# EAGLE board omnetics_nano_breakout_reverse_v2 (EAGLE 8.2.2)
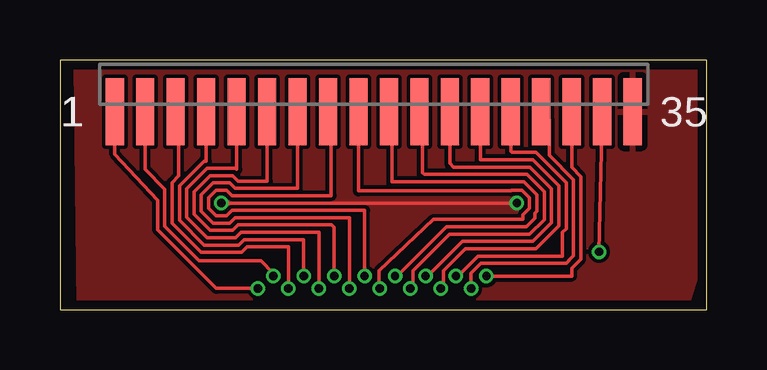
[diagram p0: board, top side]
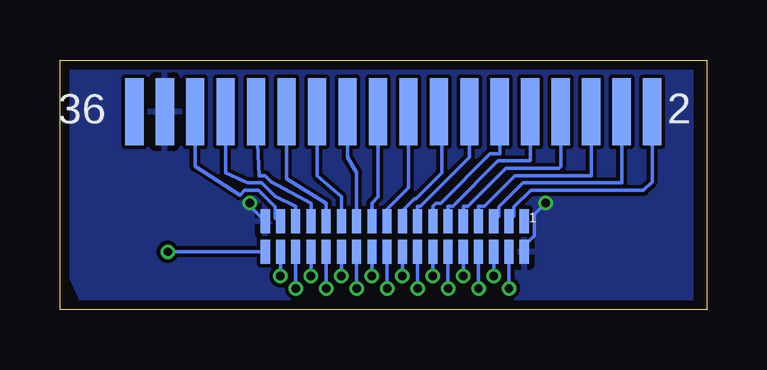
[diagram p1: board, bottom side, seen from below]

Size 26.97 x 10.4 mm. Coordinates in mm from the lower left corner, seen from the top.
Outline: 0,0 26.97,0 26.97,10.4 0,10.4 0,0
Copper layers (1*16): Top 0.035559375mm / dielectric 1.6mm / Bottom 0.035559375mm
Design rules "oshpark-2layer": minimum track width 6mil, minimum drill 10mil, track to track 6mil, track to pad 6mil, pad to pad 6mil, via to via 6mil, smd to smd 6mil, copper to edge 15mil, drill to drill 6mil, minimum pad ring 5mil, minimum via ring 5mil, stop-mask expansion 2.5mil, vias tented up to drill 0mil, thermal gap 10mil

## Footprints (pad centres in the part's own frame; a part is rotated, then mirrored left to right if it is on the bottom)
SFMC-118-L1-S-D = smd 0.762 x 2.794: 1 -10.795,-2.032; 3 -9.525,-2.032; 5 -8.255,-2.032; 7 -6.985,-2.032; 9 -5.715,-2.032; 11 -4.445,-2.032; 13 -3.175,-2.032; 15 -1.905,-2.032; 17 -0.635,-2.032; 19 0.635,-2.032; 21 1.905,-2.032; 23 3.175,-2.032; 25 4.445,-2.032; 27 5.715,-2.032; 29 6.985,-2.032; 31 8.255,-2.032; 33 9.525,-2.032; 35 10.795,-2.032 | smd 0.762 x 2.794 bottom: 2 -10.795,-2.032; 4 -9.525,-2.032; 6 -8.255,-2.032; 8 -6.985,-2.032; 10 -5.715,-2.032; 12 -4.445,-2.032; 14 -3.175,-2.032; 16 -1.905,-2.032; 18 -0.635,-2.032; 20 0.635,-2.032; 22 1.905,-2.032; 24 3.175,-2.032; 26 4.445,-2.032; 28 5.715,-2.032; 30 6.985,-2.032; 32 8.255,-2.032; 34 9.525,-2.032; 36 10.795,-2.032
OMNETICS_NANO_18X2 = smd 0.381 x 1.016: GND0 0,1.27; GND34 10.795,0; P_1 0.635,1.27; P_2 0.635,0; P_3 1.27,1.27; P_4 1.27,0; P_5 1.905,1.27; P_6 1.905,0; P_7 2.54,1.27; P_8 2.54,0; P_9 3.175,1.27; P_10 3.175,0; P_11 3.81,1.27; P_12 3.81,0; P_13 4.445,1.27; P_14 4.445,0; P_15 5.08,1.27; P_16 5.08,0; P_17 5.715,1.27; P_18 5.715,0; P_19 6.35,1.27; P_20 6.35,0; P_21 6.985,1.27; P_22 6.985,0; P_23 7.62,1.27; P_24 7.62,0; P_25 8.255,1.27; P_26 8.255,0; P_27 8.89,1.27; P_28 8.89,0; P_29 9.525,1.27; P_30 9.525,0; P_31 10.16,1.27; P_32 10.16,0; REF0 0,0; REF33 10.795,1.27

## Placement (x,y rotation side)
U$1  SFMC-118-L1-S-D  [SFMC-118-L1-S-D]  13.08,10.29 0 top
U$2  OMNETICS_NANO_18X2  [OMNETICS_NANO_18X2]  7.62,3.68 180 bottom

## Library data of the parts
U$1 = tuckerLib
U$2 = Sombeck_lib

## Nets
AGND: U$1.33 U$2.REF33
GND: U$1.34 U$1.35 U$2.GND0 U$2.GND34
N$1: U$1.1 U$2.P_1
N$2: U$1.2 U$2.P_2
N$3: U$1.4 U$2.P_4
N$4: U$1.6 U$2.P_6
N$5: U$1.8 U$2.P_8
N$6: U$1.10 U$2.P_10
N$7: U$1.12 U$2.P_12
N$8: U$1.14 U$2.P_14
N$9: U$1.16 U$2.P_16
N$10: U$1.18 U$2.P_18
N$11: U$1.20 U$2.P_20
N$12: U$1.22 U$2.P_22
N$13: U$1.24 U$2.P_24
N$14: U$1.26 U$2.P_26
N$15: U$1.28 U$2.P_28
N$16: U$1.30 U$2.P_30
N$17: U$1.32 U$2.P_32
N$18: U$1.3 U$2.P_3
N$19: U$1.5 U$2.P_5
N$20: U$1.7 U$2.P_7
N$21: U$1.9 U$2.P_9
N$22: U$1.11 U$2.P_11
N$23: U$1.13 U$2.P_13
N$24: U$1.15 U$2.P_15
N$25: U$1.17 U$2.P_17
N$26: U$1.19 U$2.P_19
N$27: U$1.21 U$2.P_21
N$28: U$1.23 U$2.P_23
N$29: U$1.25 U$2.P_25
N$30: U$1.27 U$2.P_27
N$31: U$1.29 U$2.P_29
N$32: U$1.31 U$2.P_31

## Tracks (layer width: path | path; a pad name or v marks a point on that pad's centre or on a via)
AGND  (via drill 0.35)
  Top 0.152: v22.48,2.41 U$1.33
  Bottom 0.152: U$2.REF33 v22.48,2.41
GND  (via drill 0.35)
  Top 0.152: v6.73,4.45 v19.05,4.45
  Bottom 0.152: v6.73,4.45 7.2,3.98 7.2,3.08 7.62,2.66 U$2.GND0 | v19.05,4.45 19.05,4.32 U$2.GND34
  pour Bottom: 0.64,10.16 26.54,10.16 26.54,1.4 26.04,0.25 0.64,0.38
  pour Top: 0.64,10.16 26.54,10.16 26.54,1.4 26.16,0.13 0.76,0.13
N$1  (via drill 0.35)
  Top 0.152: v8.25,0.89 6.52,0.89 4.07,3.34 4.07,4.57 2.29,6.48 U$1.1
  Bottom 0.152: U$2.P_1 v8.25,0.89
N$2
  Bottom 0.152: U$2.P_2 8.04,3.9 8.04,4.29 7.35,4.98 2.64,4.98 2.29,5.33 U$1.2
N$3
  Bottom 0.152: U$2.P_4 8.67,3.9 8.67,4.29 7.68,5.28 3.56,5.28 U$1.4
N$4
  Bottom 0.152: U$2.P_6 9.52,4.32 9.28,4.32 8.01,5.59 4.83,5.59 U$1.6
N$5
  Bottom 0.152: U$2.P_8 10.16,4.32 9.96,4.32 8.38,5.89 6.17,5.89 6.1,5.97 U$1.8
N$6
  Bottom 0.152: U$2.P_10 10.79,4.32 10.59,4.32 8.71,6.2 7.39,6.2 7.37,6.22 U$1.10
N$7
  Bottom 0.152: U$2.P_12 11.43,4.32 11.3,4.45 11.1,4.45 9.04,6.5 8.64,6.5 U$1.12
N$8
  Bottom 0.152: U$2.P_14 12.06,4.32 11.94,4.32 9.91,6.35 U$1.14
N$9
  Bottom 0.152: U$2.P_16 12.7,4.11 12.19,4.62 12.14,4.62 11.05,5.71 11.05,8.13 U$1.16
N$10
  Bottom 0.152: U$2.P_18 13.33,4.19 12.45,5.08 U$1.18
N$11
  Bottom 0.152: U$2.P_20 13.97,4.45 13.72,4.7 U$1.20
N$12
  Bottom 0.152: U$2.P_22 14.6,5.71 14.99,6.35 U$1.22
N$13
  Bottom 0.152: U$2.P_24 15.24,4.7 16.26,5.59 U$1.24
N$14
  Bottom 0.152: U$2.P_26 15.88,4.45 17.53,5.46 U$1.26
N$15
  Bottom 0.152: U$2.P_28 16.51,4.45 18.17,5.33 18.43,5.59 18.66,5.59 18.67,5.59 U$1.28
N$16
  Bottom 0.152: U$2.P_30 17.14,4.32 18.01,4.73 18.56,5.28 19.16,5.28 20.07,5.71 U$1.30
N$17
  Bottom 0.152: U$2.P_32 18,3.82 18,4.29 18.69,4.98 19.27,4.98 19.47,4.77 21.34,5.97 U$1.32
N$18  (via drill 0.35)
  Top 0.152: v8.89,1.4 8.89,1.52 8.38,2.03 5.81,2.03 4.37,3.47 4.37,5.03 3.56,5.84 U$1.3
  Bottom 0.152: U$2.P_3 v8.89,1.4
N$19  (via drill 0.35)
  Top 0.152: v9.52,0.89 9.52,2.62 7.81,2.62 7.58,2.39 5.88,2.39 4.68,3.59 4.68,5.3 4.95,5.57 4.95,8.13 U$1.5
  Bottom 0.152: U$2.P_5 v9.52,0.89
N$20  (via drill 0.35)
  Top 0.152: v10.16,1.4 10.16,2.92 7.68,2.92 7.46,2.7 6.01,2.7 4.98,3.72 4.98,5.17 6.01,6.2 6.1,6.2 U$1.7
  Bottom 0.152: U$2.P_7 v10.16,1.4
N$21  (via drill 0.35)
  Top 0.152: v10.79,0.89 10.79,3.23 7.56,3.23 7.33,3 6.13,3 5.29,3.85 5.29,5.04 6.13,5.89 7.33,5.89 7.37,5.85 U$1.9
  Bottom 0.152: U$2.P_9 v10.79,0.89
N$22  (via drill 0.35)
  Top 0.152: v11.43,1.4 11.43,3.43 11.33,3.53 7.43,3.53 7.2,3.31 6.26,3.31 5.59,3.97 5.59,4.92 6.26,5.59 7.2,5.59 7.43,5.36 8.64,5.36 U$1.11
  Bottom 0.152: U$2.P_11 v11.43,1.4
N$23  (via drill 0.35)
  Top 0.152: v12.06,0.89 12.06,3.83 7.3,3.83 7.08,3.61 6.39,3.61 5.9,4.1 5.9,4.79 6.39,5.28 7.08,5.28 7.3,5.05 9.91,5.05 U$1.13
  Bottom 0.152: U$2.P_13 v12.06,0.89
N$24  (via drill 0.35)
  Top 0.152: v12.7,1.4 12.7,4.14 7.18,4.14 6.95,3.91 6.51,3.91 6.2,4.22 6.2,4.67 6.51,4.98 6.95,4.98 7.18,4.75 11.3,4.75 11.3,8.13 U$1.15
  Bottom 0.152: U$2.P_15 v12.7,1.4
N$25  (via drill 0.35)
  Top 0.152: v13.33,0.89 13.31,0.99 13.31,1.62 15.58,3.76 19.3,3.76 19.3,3.95 19.58,4.22 19.58,4.67 19.27,4.98 18.83,4.98 18.81,4.95 12.45,4.95 U$1.17
  Bottom 0.152: U$2.P_17 v13.33,0.89
N$26  (via drill 0.35)
  Top 0.152: v13.97,1.4 14.06,1.4 16.12,3.45 19.18,3.45 19.28,3.45 19.46,3.45 19.81,3.81 19.81,4.03 19.88,4.1 19.88,4.79 19.34,5.33 13.84,5.33 13.84,8 U$1.19
  Bottom 0.152: U$2.P_19 v13.97,1.4
N$27  (via drill 0.35)
  Top 0.152: v14.6,0.89 14.71,0.99 14.71,1.62 16.24,3.15 19.58,3.15 20.19,3.76 20.19,4.92 19.47,5.64 15.19,5.64 15.11,5.71 15.11,8 U$1.21
  Bottom 0.152: U$2.P_21 v14.6,0.89
N$28  (via drill 0.35)
  Top 0.152: v15.24,1.4 15.33,1.4 16.78,2.85 19.71,2.85 20.5,3.63 20.5,5.04 19.59,5.94 16.41,5.94 16.26,6.1 U$1.23
  Bottom 0.152: U$2.P_23 v15.24,1.4
N$29  (via drill 0.35)
  Top 0.152: v15.88,0.89 15.98,0.99 15.98,1.62 16.9,2.54 19.3,2.54 19.84,2.54 20.8,3.5 20.8,5.17 19.72,6.25 17.53,6.25 U$1.25
  Bottom 0.152: U$2.P_25 v15.88,0.89
N$30  (via drill 0.35)
  Top 0.152: v16.51,1.4 16.6,1.4 17.43,2.23 20.95,2.23 20.95,3.23 21.11,3.38 21.11,5.3 19.85,6.55 18.85,6.55 18.8,6.6 U$1.27
  Bottom 0.152: U$2.P_27 v16.51,1.4
N$31  (via drill 0.35)
  Top 0.152: v17.14,0.89 17.14,1.51 17.56,1.93 21.11,1.93 21.21,2.03 21.21,2.05 21.41,2.26 21.41,5.42 20.4,6.43 20.4,7.92 U$1.29
  Bottom 0.152: U$2.P_29 v17.14,0.89
N$32  (via drill 0.35)
  Top 0.152: v17.78,1.4 21.34,1.4 21.34,1.73 21.71,2.11 21.71,5.55 21.34,5.93 U$1.31
  Bottom 0.152: U$2.P_31 v17.78,1.4